# EAGLE board OpenBook-board (EAGLE 9.7.0)
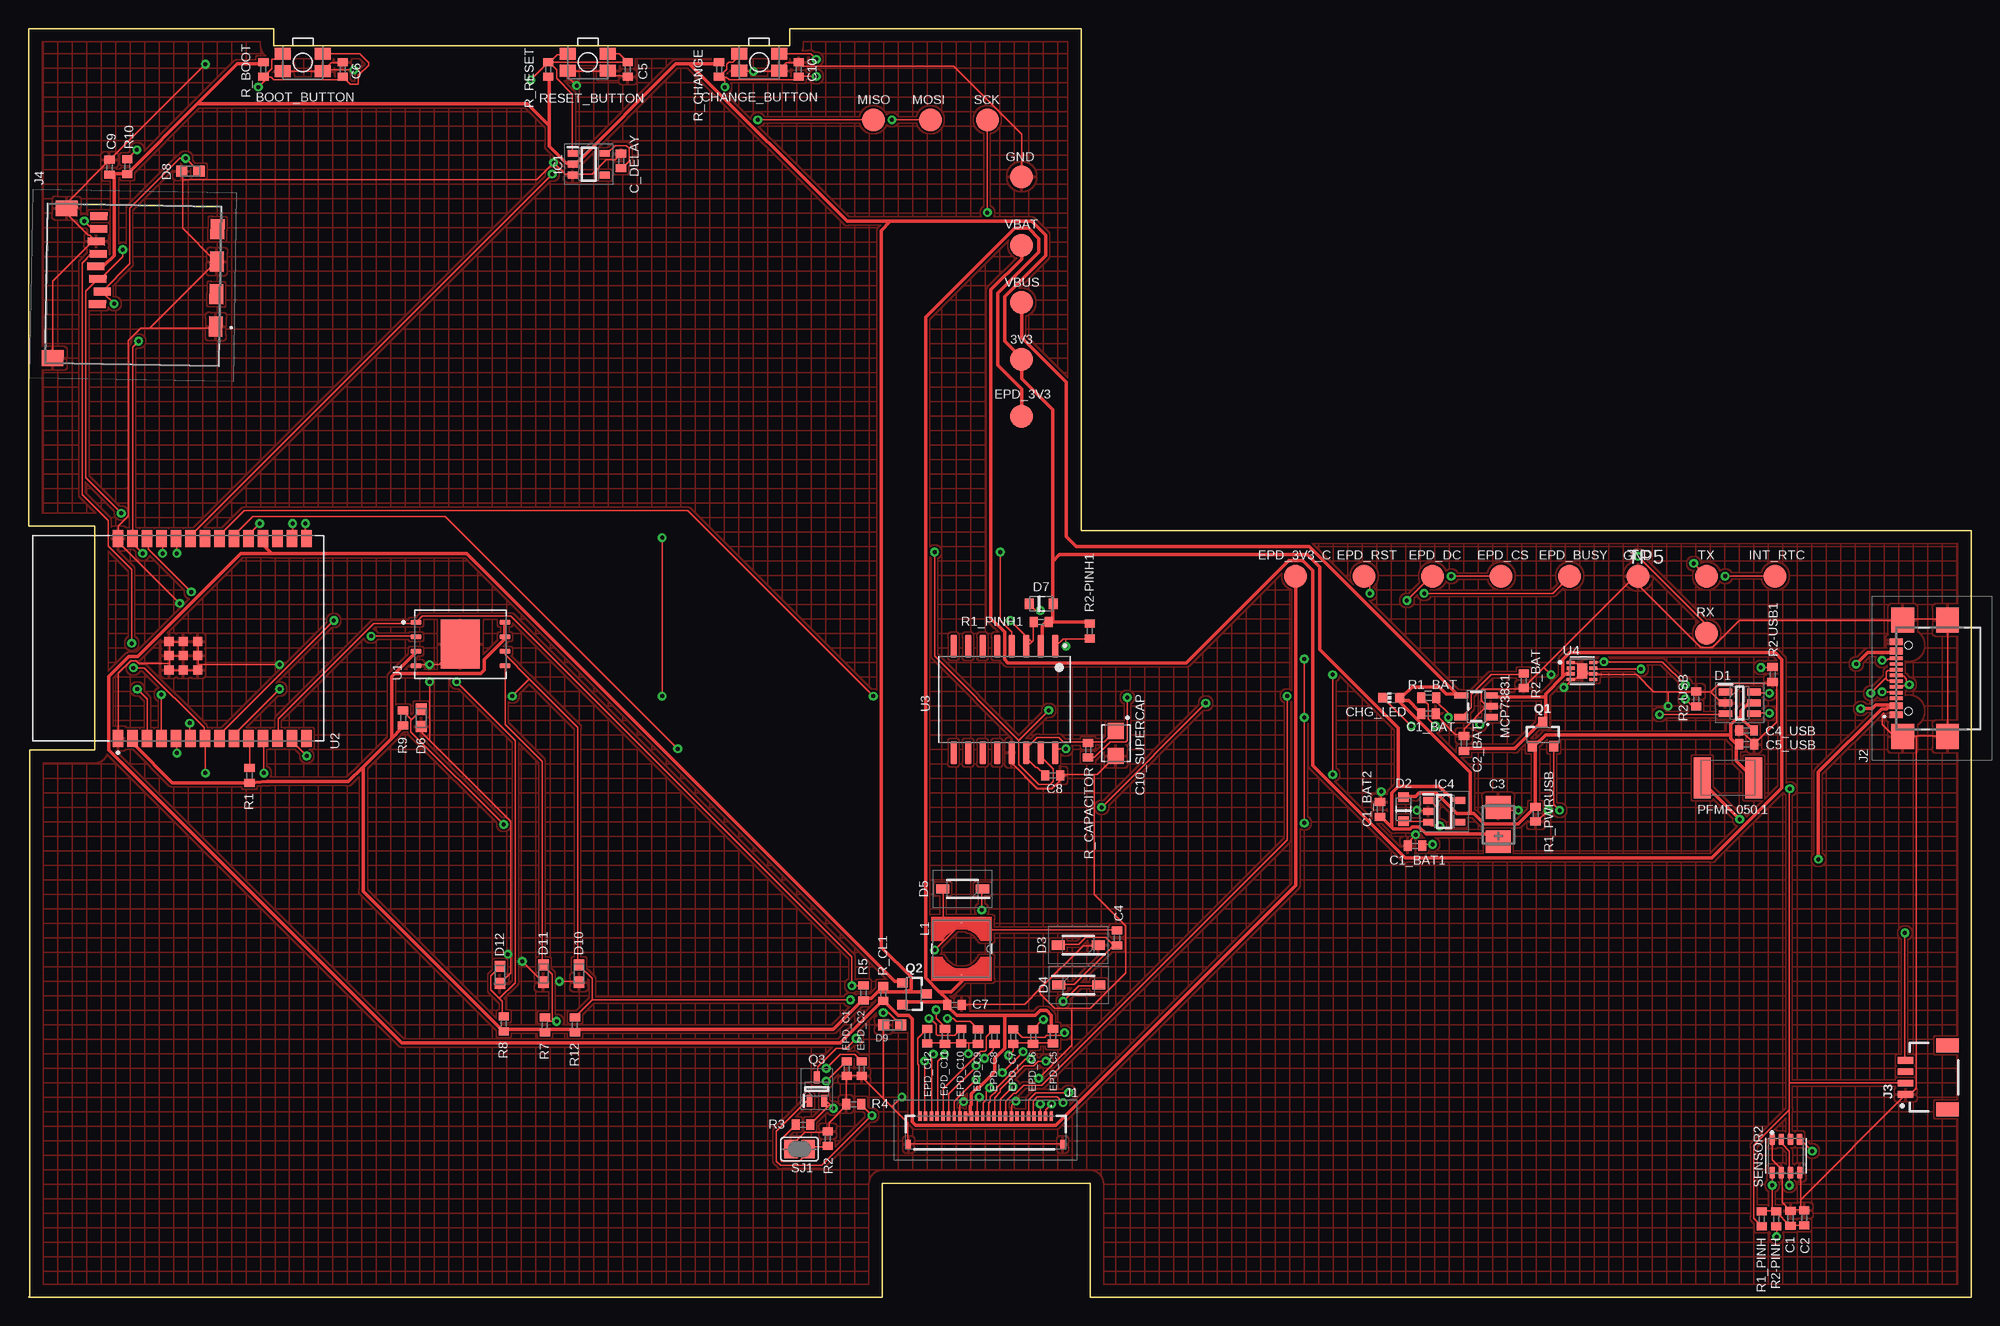
[diagram p0: board, top side]
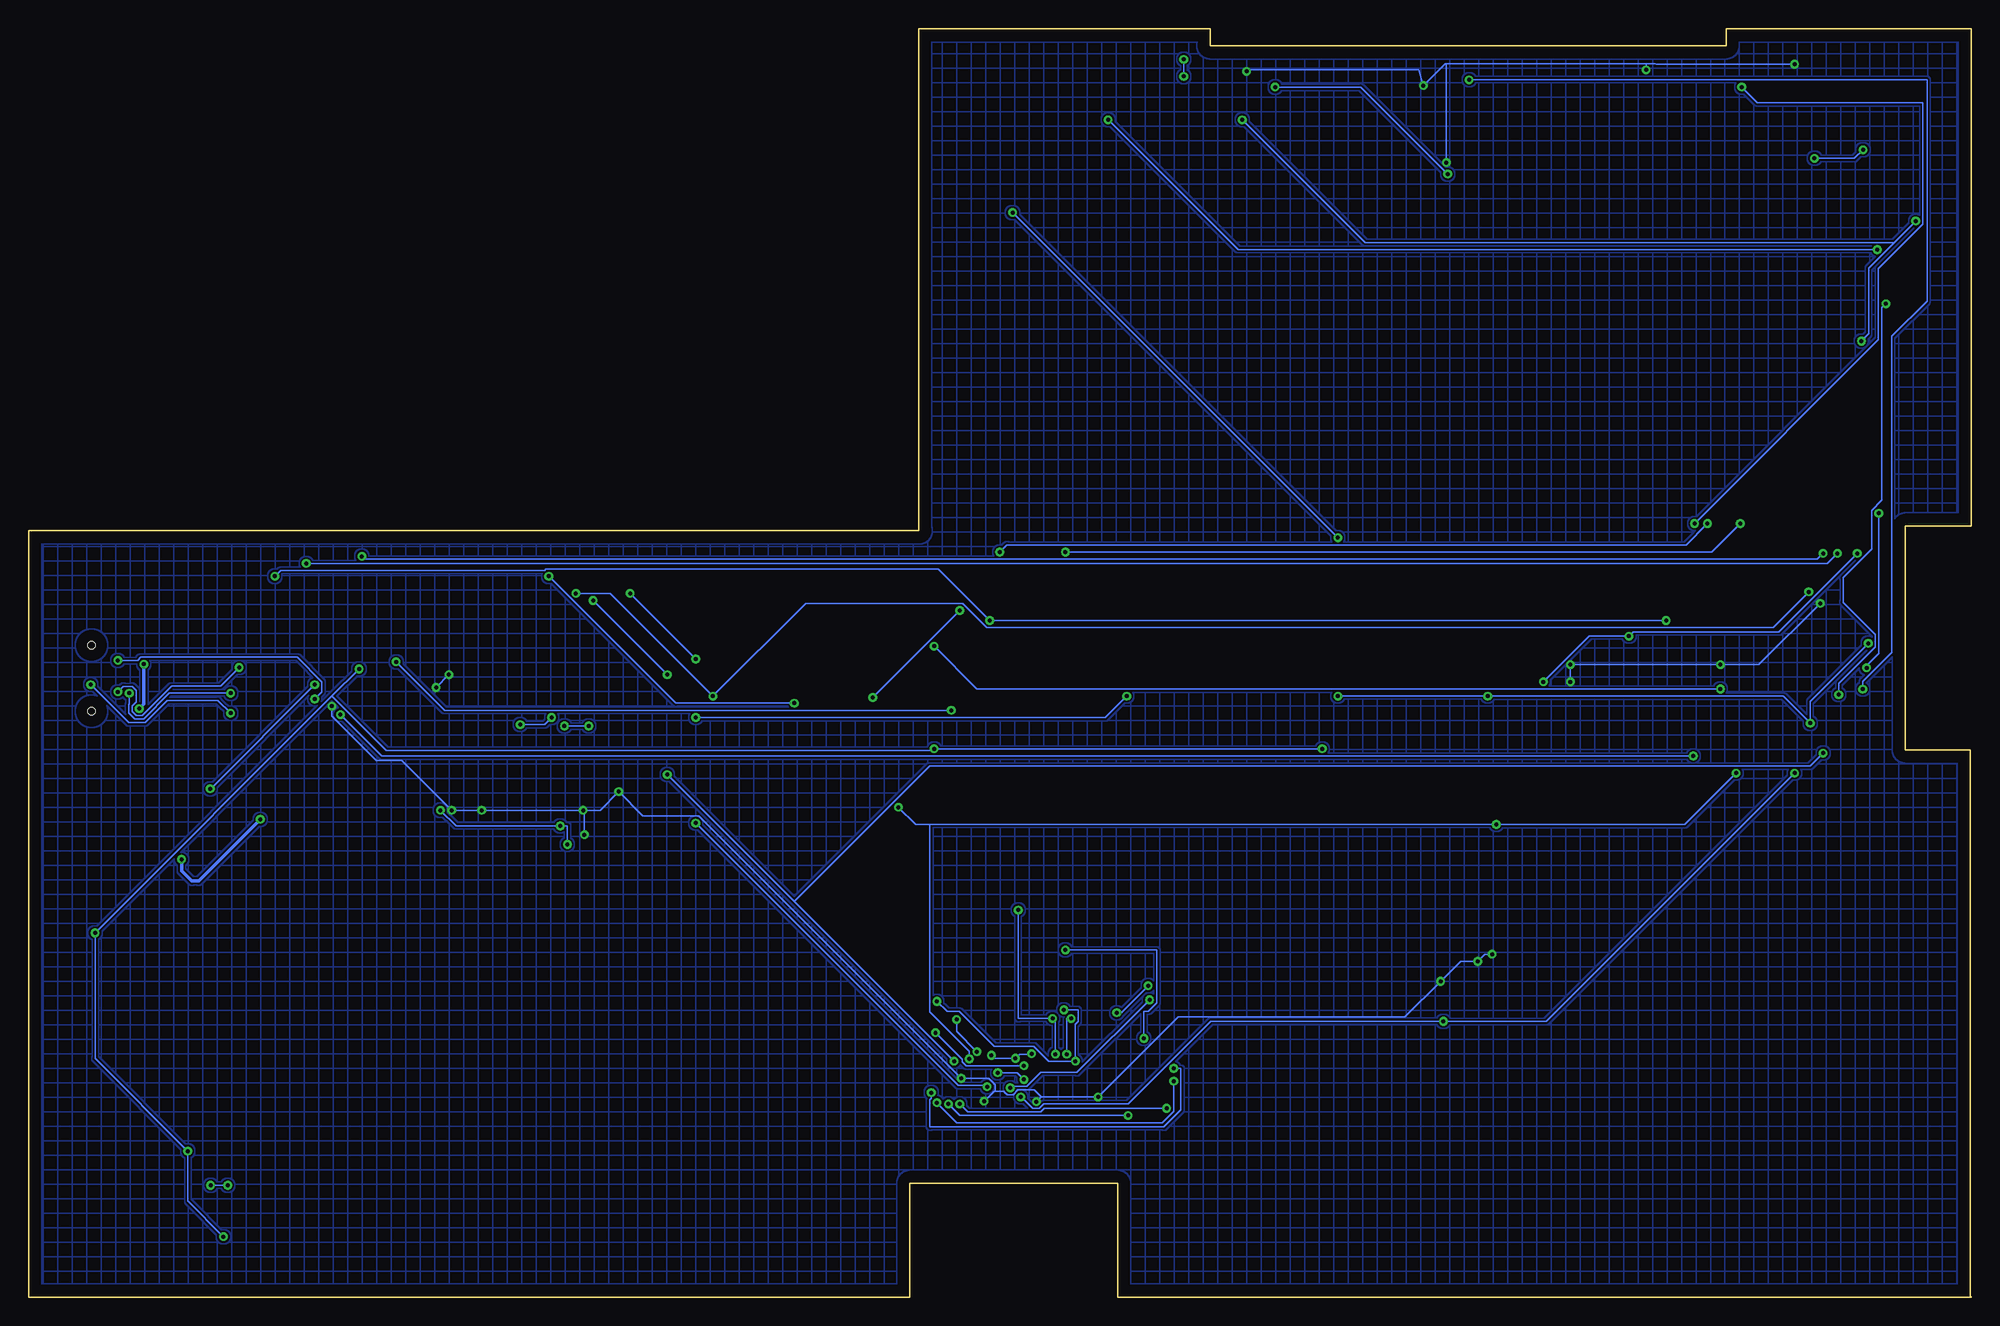
[diagram p1: board, bottom side, seen from below]

Size 170.2 x 111.2 mm. Coordinates in mm from the lower left corner, seen from the top.
Outline: 0,111.2 0,67.6 5.8,67.6 5.8,48 0.1,48 0.1,0.1 0,0 74.8,0 74.8,10 93,10 93,0 170.2,0 170.2,67.2 92.2,67.2 92.2,111.2 66.7,111.2 66.7,109.7 21.5,109.7 21.5,111.2 0,111.2
Copper layers (1*16): Top 0.035mm / dielectric 1.5mm / Bottom 0.035mm
Design rules "Fusion Electronics Design Rules": minimum track width 6mil, minimum drill 0.35mm, track to track 6mil, track to pad 6mil, pad to pad 6mil, via to via 6mil, smd to smd 6mil, copper to edge 40mil, drill to drill 6mil, minimum pad ring 10mil, minimum via ring 8mil, stop-mask expansion 4mil, vias tented up to drill 0mil, thermal gap 10mil
Net classes: 0 default: width 0.152 mm; 1 PowerNets: width 0.3 mm
bRestrict: area 0.3,48.8 to 6.4,66.9
vRestrict: area 0.3,48.7 to 6.4,66.8

## Footprints (pad centres in the part's own frame; a part is rotated, then mirrored left to right if it is on the bottom)
TP20R = smd 2 x 2: TP 0,0
MYBUTTON = smd 1.4 x 1.05: 1 1.75,0.75; 2 -1.75,0.75; 3 -1.75,-0.75; 4 1.75,-0.75
EAGLE-LTSPICE_C0402 = smd 0.7 x 0.9: 1 -0.65,0; 2 0.65,0
ESP32_WROVER_EAGLE-LTSPICE_C0402 = smd 0.7 x 0.9: 1 -0.65,0; 2 0.65,0
RCL_CT3528 = smd 2 x 2.2: + -1.5,0; - 1.5,0
CAPCP3225X100N = smd 1.4 x 1.4: 1 -1.1,0; 2 1.1,0
ADAFRUIT_CHIP-LED0603 = smd 0.8 x 0.8: A 0,-0.75; C 0,0.75
SOT95P280X145-6N = smd 1.2 x 0.6: 1 -1.25,0.95; 2 -1.25,0; 3 -1.25,-0.95; 4 1.25,-0.95; 5 1.25,0; 6 1.25,0.95
ESP32_WROVER_AVX---SD0805S020S1R0_AVX_SD0805S020S1R0_0 = smd 0.8 x 0.9: 1 -1.05,0; 2 1.05,0
SOD3716X135N = smd 1.15 x 0.8: 1 -1.75,0; 2 1.75,0
DIOC1608X36N = smd 0.97 x 0.94: 1 -0.75,0; 2 0.75,0
SOT95P280X125-5N = smd 0.9 x 0.6: 1 -1.4,0.95; 2 -1.4,0; 3 -1.4,-0.95; 4 1.4,-0.95; 5 1.4,0.95
SOT95P280X120-5N = smd 0.9 x 0.6: 1 -1.4,0.95; 2 -1.4,0; 3 -1.4,-0.95; 4 1.4,-0.95; 5 1.4,0.95
FH34SRJ24S05SH99 = smd 0.3 x 0.8: 1 5.75,1.45; 2 5.25,1.45; 3 4.75,1.45; 4 4.25,1.45; 5 3.75,1.45; 6 3.25,1.45; 7 2.75,1.45; 8 2.25,1.45; 9 1.75,1.45; 10 1.25,1.45; 11 0.75,1.45; 12 0.25,1.45; 13 -0.25,1.45; 14 -0.75,1.45; 15 -1.25,1.45; 16 -1.75,1.45; 17 -2.25,1.45; 18 -2.75,1.45; 19 -3.25,1.45; 20 -3.75,1.45; 21 -4.25,1.45; 22 -4.75,1.45; 23 -5.25,1.45; 24 -5.75,1.45 | smd 0.4 x 0.8: MP1 6.75,-1.05; MP2 -6.75,-1.05
SAMACSYS_PARTS_USB4110GFA = smd 0.3 x 1.15: A1 -3.35,3.678; A4 -2.55,3.678; A5 -1.25,3.678; A6 -0.25,3.678; A7 0.25,3.678; A8 1.25,3.678; A9 2.55,3.678; A12 3.35,3.678; B1 3.05,3.678; B4 2.25,3.678; B5 1.75,3.678; B6 0.75,3.678; B7 -0.75,3.678; B8 -1.75,3.678; B9 -2.25,3.678; B12 -3.05,3.678 | smd 2.18 x 2: MP1 -5.11,-0.827; MP2 5.11,-0.827; MP3 -5.11,3.103; MP4 5.11,3.103 | hole 0.65: -2.89,2.603; 2.89,2.603
JST04_1MM_RA = smd 0.6 x 1.35: 1 -1.5,0; 2 -0.5,0; 3 0.5,0; 4 1.5,0 | smd 1.2 x 2: NC1 2.8,-3.675; NC2 -2.8,-3.675
112ATAARR03ATTEND = smd 1.8 x 1.2: G1 10.6,10.4; G2 4.9,10.4; S1 7.75,10.4; S2 2.05,10.4 | smd 1.4 x 1.9: G3 13.6,-3.85; G4 0.45,-2.85 | smd 0.7 x 1.5: P1 8.8,0; P2 7.7,0.4; P3 6.6,0; P4 5.5,-0.2; P5 4.4,0; P6 3.3,-0.2; P7 2.2,0; P8 1.1,0
IND_4828-WE-TPC_WRE = smd 0.127 x 0.127: 1 -2.286,0; 2 2.286,0
ESP32_WROVER_SPARKFUN-IC-POWER_SOT23-5 = smd 0.55 x 1.2: 1 -0.95,-1.3; 2 0,-1.3; 3 0.95,-1.3; 4 0.95,1.3; 5 -0.95,1.3
ESP32C6_VARISTOR_CT/CN1812 = smd 1.5 x 3.6: 1 -2.25,0; 2 2.25,0
ESP32_WROVER_SPARKFUN-DISCRETESEMI_SOT23-3 = smd 0.8 x 0.9: 1 -0.95,-1; 2 0.95,-1; 3 0,1.1
SOT65P210X110-3N = smd 1.05 x 0.5: 1 -1.05,0.65; 2 -1.05,-0.65; 3 1.05,0
ESP32_WROVER_EAGLE-LTSPICE_R0402 = smd 0.7 x 0.9: 1 -0.65,0; 2 0.65,0
ESP32_WROVER_BME680_PSON80P300X300X100-8N = smd 1.016 x 0.5: 1 1.458,1.2; 2 1.458,0.4; 3 1.458,-0.4; 4 1.458,-1.2; 5 -1.458,-1.22; 6 -1.458,-0.4; 7 -1.458,0.4; 8 -1.458,1.2
SJ = smd 1.168 x 1.6: 1 -0.762,0; 2 0.762,0
SON127P600X800X80-9N = smd 0.94 x 0.44: 1 -3.895,1.905; 2 -3.895,0.635; 3 -3.895,-0.635; 4 -3.895,-1.905; 5 3.895,-1.905; 6 3.895,-0.635; 7 3.895,0.635; 8 3.895,1.905 | smd 3.4 x 4.3: 9 0,0
XCVR_ESP32-C6-WROOM-1-N8 = smd 1.5 x 0.9: 1 -8.75,5.26; 2 -8.75,3.99; 3 -8.75,2.72; 4 -8.75,1.45; 5 -8.75,0.18; 6 -8.75,-1.09; 7 -8.75,-2.36; 8 -8.75,-3.63; 9 -8.75,-4.9; 10 -8.75,-6.17; 11 -8.75,-7.44; 12 -8.75,-8.71; 13 -8.75,-9.98; 14 -8.75,-11.25; 15 8.75,-11.25; 16 8.75,-9.98; 17 8.75,-8.71; 18 8.75,-7.44; 19 8.75,-6.17; 20 8.75,-4.9; 21 8.75,-3.63; 22 8.75,-2.36; 23 8.75,-1.09; 24 8.75,0.18; 25 8.75,1.45; 26 8.75,2.72; 27 8.75,3.99; 28 8.75,5.26 | smd 0.8 x 0.8: 29_1 -2.755,0.79; 29_2 -1.505,0.79; 29_3 -0.255,0.79; 29_4 -2.755,-0.46; 29_5 -1.505,-0.46; 29_6 -0.255,-0.46; 29_7 -2.755,-1.71; 29_8 -1.505,-1.71; 29_9 -0.255,-1.71
SOIC127P1032X265-16N = smd 2.05 x 0.59: 1 -4.655,4.445; 2 -4.655,3.175; 3 -4.655,1.905; 4 -4.655,0.635; 5 -4.655,-0.635; 6 -4.655,-1.905; 7 -4.655,-3.175; 8 -4.655,-4.445; 9 4.655,-4.445; 10 4.655,-3.175; 11 4.655,-1.905; 12 4.655,-0.635; 13 4.655,0.635; 14 4.655,1.905; 15 4.655,3.175; 16 4.655,4.445
SON50P200X200X80-9N = smd 0.76 x 0.27: 1 -0.985,0.75; 2 -0.985,0.25; 3 -0.985,-0.25; 4 -0.985,-0.75; 5 0.985,-0.75; 6 0.985,-0.25; 7 0.985,0.25; 8 0.985,0.75 | smd 0.9 x 1.3: 9 0,0

## Placement (x,y rotation side)
3V3  TPTP20R  [TP20R]  87,82.2 0 top
BOOT_BUTTON  BUTTON_CUSYOMV1  [MYBUTTON]  24.03,108.23 180 top
C1  100nF  [EAGLE-LTSPICE_C0402]  154.35,6.94 90 top
C1_BAT  4.7uF  [EAGLE-LTSPICE_C0402]  122.64,51.16 0 top
C1_BAT1  4.7uF  [EAGLE-LTSPICE_C0402]  121.45,39.58 0 top
C1_BAT2  4.7uF  [ESP32_WROVER_EAGLE-LTSPICE_C0402]  118.39,42.78 90 top
C2  [EAGLE-LTSPICE_C0402]  155.55,6.98 90 top
C2_BAT  4.7uF  [EAGLE-LTSPICE_C0402]  125.75,48.56 90 top
C3  100uF TANT  [RCL_CT3528]  128.75,41.44 90 top
C4  4.7uF/25V  [EAGLE-LTSPICE_C0402]  95.35,31.5 90 top
C4_USB  100nF  [EAGLE-LTSPICE_C0402]  150.5,49.68 180 top
C5  1uF  [EAGLE-LTSPICE_C0402]  52.49,107.61 270 top
C5_USB  4.7uF  [EAGLE-LTSPICE_C0402]  150.51,48.48 0 top
C6  100nF  [EAGLE-LTSPICE_C0402]  27.53,107.61 90 top
C7  10uF  [ESP32_WROVER_EAGLE-LTSPICE_C0402]  81.12,25.64 0 top
C8  100nF  [EAGLE-LTSPICE_C0402]  89.71,45.74 0 top
C9  100nF  [ESP32_WROVER_EAGLE-LTSPICE_C0402]  7.09,99.04 90 top
C10  100nF  [EAGLE-LTSPICE_C0402]  67.47,107.61 90 top
C10_SUPERCAP  CPH3225A  [CAPCP3225X100N]  95.26,48.55 270 top
C_DELAY  100nF  [EAGLE-LTSPICE_C0402]  51.91,99.6 90 top
CHANGE_BUTTON  BUTTON_CUSYOMV1  [MYBUTTON]  64,108.23 180 top
CHG_LED  [ADAFRUIT_CHIP-LED0603]  119.38,52.55 90 top
D1  USBLC6-2SC6Y  [SOT95P280X145-6N]  149.9,52.1 0 top
D2  ESP32_WROVER_AVX---SD0805S020S1R0_AVX_SD0805S020S1R0_0_0AVX_SD0805S020S1R0_0_0  [ESP32_WROVER_AVX---SD0805S020S1R0_AVX_SD0805S020S1R0_0]  120.45,42.79 90 top
D3  MBR0530  [SOD3716X135N]  91.96,30.88 180 top
D4  MBR0530  [SOD3716X135N]  92,27.38 0 top
D5  MBR0530  [SOD3716X135N]  81.82,35.79 180 top
D6  PGB1010603MR  [DIOC1608X36N]  34.4,50.8 90 top
D7  ESP32_WROVER_AVX---SD0805S020S1R0_AVX_SD0805S020S1R0_0_0AVX_SD0805S020S1R0_0_0  [ESP32_WROVER_AVX---SD0805S020S1R0_AVX_SD0805S020S1R0_0]  88.7,60.79 0 top
D8  PGB1010603MR  [DIOC1608X36N]  14.18,98.7 0 top
D9  PGB1010603MR  [DIOC1608X36N]  75.65,23.88 0 top
D10  PGB1010603MR  [DIOC1608X36N]  48.23,28.38 90 top
D11  PGB1010603MR  [DIOC1608X36N]  45.11,28.38 90 top
D12  PGB1010603MR  [DIOC1608X36N]  41.29,28.28 90 top
EPD_3V3  TPTP20R  [TP20R]  87,77.2 0 top
EPD_3V3_C  TPTP20R  [TP20R]  111,63.2 0 top
EPD_BUSY  TPTP20R  [TP20R]  135,63.2 0 top
EPD_C1  1uF/50V  [EAGLE-LTSPICE_C0402]  71.68,20.06 90 top
EPD_C2  1uF/50V  [EAGLE-LTSPICE_C0402]  72.99,20.06 90 top
EPD_C5  0.1uF/50V  [EAGLE-LTSPICE_C0402]  89.75,22.9 90 top
EPD_C6  1uF/50V  [EAGLE-LTSPICE_C0402]  88,22.86 90 top
EPD_C7  1uF/50V  [EAGLE-LTSPICE_C0402]  86.25,22.86 90 top
EPD_C8  1uF/50V  [EAGLE-LTSPICE_C0402]  84.62,22.86 90 top
EPD_C9  1uF/50V  [EAGLE-LTSPICE_C0402]  83.17,22.86 90 top
EPD_C10  1uF/50V  [EAGLE-LTSPICE_C0402]  81.7,22.9 90 top
EPD_C11  1uF/50V  [EAGLE-LTSPICE_C0402]  80.28,22.88 90 top
EPD_C12  1uF/50V  [EAGLE-LTSPICE_C0402]  78.73,22.9 90 top
EPD_CS  TPTP20R  [TP20R]  129,63.2 0 top
EPD_DC  TPTP20R  [TP20R]  123,63.2 0 top
EPD_RST  TPTP20R  [TP20R]  117,63.2 0 top
GND  TPTP20R  [TP20R]  87,98.2 0 top
IC1  BD5229G-TR  [SOT95P280X125-5N]  49.07,99.3 0 top
IC4  XC6220A331MR-G  [SOT95P280X120-5N]  124.01,42.6 0 top
INT_RTC  TPTP20R  [TP20R]  153,63.2 0 top
J1  FH34SRJ-24S-0.5SH_99_  [FH34SRJ24S05SH99]  83.84,14.45 0 top
J2  SAMACSYS_PARTS_USB4110-GF-A  [SAMACSYS_PARTS_USB4110GFA]  167.28,54.26 90 top
J3  QWIIC_RIGHT_ANGLE  [JST04_1MM_RA]  164.43,19.29 90 top
J4  112A-TAAR-R03_ATTEND3DMODEL  [112ATAARR03ATTEND]  6.19,95.85 269 top
L1  744043680IND_4828-WE-TPC_WRE  [IND_4828-WE-TPC_WRE]  81.73,30.55 270 top
MCP73831  ESP32_WROVER_SPARKFUN-IC-POWER_MCP73831  [ESP32_WROVER_SPARKFUN-IC-POWER_SOT23-5]  126.81,51.8 90 top
MISO  TPTP20R  [TP20R]  74,103.2 0 top
MOSI  TPTP20R  [TP20R]  79,103.2 0 top
PFMF.050.1  ESP32C6_VARISTORCN1812  [ESP32C6_VARISTOR_CT/CN1812]  148.88,45.54 0 top
Q1  20V/4.2A/52mΩ/1.4W  [ESP32_WROVER_SPARKFUN-DISCRETESEMI_SOT23-3]  132.66,49.31 0 top
Q2  20V/4.2A/52mΩ/1.4W  [ESP32_WROVER_SPARKFUN-DISCRETESEMI_SOT23-3]  77.56,26.61 270 top
Q3  SI1308EDL-T1-GE3  [SOT65P210X110-3N]  69.05,18.26 90 top
R1  10K  [ESP32_WROVER_EAGLE-LTSPICE_R0402]  19.36,45.74 270 top
R1_BAT  200  [ESP32_WROVER_EAGLE-LTSPICE_R0402]  122.66,52.56 0 top
R1_PINH  10K  [ESP32_WROVER_EAGLE-LTSPICE_R0402]  151.83,6.88 90 top
R1_PINH1  10K  [ESP32_WROVER_EAGLE-LTSPICE_R0402]  88.71,59.2 0 top
R1_PWRUSB  100K  [ESP32_WROVER_EAGLE-LTSPICE_R0402]  132.02,42.35 90 top
R2  2.2  [ESP32_WROVER_EAGLE-LTSPICE_R0402]  70.01,13.92 270 top
R2-PINH  10K  [ESP32_WROVER_EAGLE-LTSPICE_R0402]  153.09,6.88 90 top
R2-PINH1  10K  [ESP32_WROVER_EAGLE-LTSPICE_R0402]  92.97,58.4 90 top
R2-USB  5k1  [ESP32_WROVER_EAGLE-LTSPICE_R0402]  146.09,52.44 90 top
R2-USB1  5k1  [ESP32_WROVER_EAGLE-LTSPICE_R0402]  152.78,54.58 90 top
R2_BAT  2K  [ESP32_WROVER_EAGLE-LTSPICE_R0402]  130.98,54.04 90 top
R3  0.47  [ESP32_WROVER_EAGLE-LTSPICE_R0402]  67.84,15.14 0 top
R4  10K  [ESP32_WROVER_EAGLE-LTSPICE_R0402]  72.28,16.94 0 top
R5  [ESP32_WROVER_EAGLE-LTSPICE_R0402]  73.14,26.68 90 top
R7  [ESP32_WROVER_EAGLE-LTSPICE_R0402]  45.23,23.88 90 top
R8  [ESP32_WROVER_EAGLE-LTSPICE_R0402]  41.62,23.98 90 top
R9  [ESP32_WROVER_EAGLE-LTSPICE_R0402]  32.81,50.78 90 top
R10  [ESP32_WROVER_EAGLE-LTSPICE_R0402]  8.64,99.08 90 top
R12  [ESP32_WROVER_EAGLE-LTSPICE_R0402]  47.86,23.88 90 top
R_BOOT  10K  [ESP32_WROVER_EAGLE-LTSPICE_R0402]  20.58,107.61 90 top
R_CAPACITOR  15  [ESP32_WROVER_EAGLE-LTSPICE_R0402]  92.82,47.95 90 top
R_CHANGE  10K  [ESP32_WROVER_EAGLE-LTSPICE_R0402]  60.49,107.61 90 top
R_CL1  10K  [ESP32_WROVER_EAGLE-LTSPICE_R0402]  74.87,26.64 90 top
R_RESET  10K  [ESP32_WROVER_EAGLE-LTSPICE_R0402]  45.53,107.61 270 top
RESET_BUTTON  BUTTON_CUSYOMV1  [MYBUTTON]  48.99,108.23 180 top
RX  TPTP20R  [TP20R]  147,58.2 0 top
SCK  TPTP20R  [TP20R]  84,103.2 0 top
SENSOR2  ESP32_WROVER_BME680_BME680  [ESP32_WROVER_BME680_PSON80P300X300X100-8N]  153.94,12.4 90 top
SJ1  [SJ]  67.54,13 0 top
TP5  TPTP20R  [TP20R]  141,63.2 0 top
TX  TPTP20R  [TP20R]  147,63.2 0 top
U1  W25Q512JVEIQ  [SON127P600X800X80-9N]  37.83,57.26 0 top
U2  ESP32-C6-WROOM-1-N8  [XCVR_ESP32-C6-WROOM-1-N8]  13.1,57.75 90 top
U3  DS3231SN#  [SOIC127P1032X265-16N]  85.49,52.4 270 top
U4  MAX17048G+T10  [SON50P200X200X80-9N]  136.1,54.9 0 top
VBAT  TPTP20R  [TP20R]  87,92.2 0 top
VBUS  TPTP20R  [TP20R]  87,87.2 0 top

## Library data of the parts
3V3 BOOT_BUTTON CHANGE_BUTTON CHG_LED EPD_3V3 EPD_3V3_C EPD_BUSY EPD_CS EPD_DC EPD_RST GND INT_RTC J4 MISO MOSI PFMF.050.1 RESET_BUTTON RX SCK SJ1 TP5 TX VBAT VBUS = DeskAssistant v19 v1
C1 C1_BAT C1_BAT1 C1_BAT2 C2 C2_BAT C4 C4_USB C5 C5_USB C6-C10 C_DELAY EPD_C1 EPD_C2 EPD_C5-EPD_C12 = DeskAssistant v19 v1; SPICEMODEL: NONE; SPICEPREFIX: C
C3 = DeskAssistant v19 v1; SPICEPREFIX: C
C10_SUPERCAP = DeskAssistant v19 v1; AVAILABILITY: Not in stock; CHECK_PRICES: https://www.snapeda.com/parts/CPH3225A/Seiko+Instruments/view-part/?ref=eda; DESCRIPTION: 11 mF (EDLC) Supercapacitor 3.3 V 1210 (3225 Metric) - -; MF: Seiko Instruments; MP: CPH3225A; PACKAGE: 1210 Seiko; PRICE: None; PURCHASE-URL: https://www.snapeda.com/api/url_track_click_mouser/?unipart_id=562593&manufacturer=Seiko Instruments&part_name=CPH3225A&search_term=None; SNAPEDA_LINK: https://www.snapeda.com/parts/CPH3225A/Seiko+Instruments/view-part/?ref=snap
D1 = DeskAssistant v19 v1; AVAILABILITY: In Stock; CHECK_PRICES: https://www.snapeda.com/parts/USBLC6-2SC6Y/STMicroelectronics/view-part/?ref=eda; DESCRIPTION: 17V Clamp 5A (8/20µs) Ipp Tvs Diode Surface Mount SOT-23-6; MF: STMicroelectronics; MP: USBLC6-2SC6Y; PACKAGE: SOT-23-6 STMicroelectronics; PRICE: None; SNAPEDA_LINK: https://www.snapeda.com/parts/USBLC6-2SC6Y/STMicroelectronics/view-part/?ref=snap
D2 D7 = DeskAssistant v19 v1; CENTROID_NOT_SPECIFIED: No; DATASHEET: http://datasheets.avx.com/schottky.pdf; DIGIKEY_DESCRIPTION: DIODE SCHOTTKY 20V 1A 0805; DIGIKEY_PART_NUMBER: 478-7800-1-ND; LEAD_FREE: yes; MF: AVX; MOUSER_PART_NUMBER: 581-SD0805S020S1R0; PACKAGE: 0805 (2012 metric); PREFIX: D; ROHS: yes; TEMPERATURE_RANGE_HIGH: +125°C; TEMPERATURE_RANGE_LOW: -55°C
D3-D5 = DeskAssistant v19 v1; AVAILABILITY: In Stock; CHECK_PRICES: https://www.snapeda.com/parts/MBR0530/Onsemi/view-part/?ref=eda; DESCRIPTION: Diode Schottky 30 V 500mA Surface Mount SOD-123; MF: ON Semiconductor; MP: MBR0530; PACKAGE: SOD-123-2 ON Semiconductor; PRICE: None; PURCHASE-URL: https://www.snapeda.com/api/url_track_click_mouser/?unipart_id=179458&manufacturer=ON Semiconductor&part_name=MBR0530&search_term=None; SNAPEDA_LINK: https://www.snapeda.com/parts/MBR0530/Onsemi/view-part/?ref=snap
D6 D8-D12 = DeskAssistant v19 v1; AVAILABILITY: In Stock; CHECK_PRICES: https://www.snapeda.com/parts/PGB1010603MR/Littelfuse/view-part/?ref=eda; DESCRIPTION: 150V (Typ) Clamp - Ipp Tvs Diode Surface Mount 0603 (1608 Metric); MF: Littelfuse Inc.; MP: PGB1010603MR; PACKAGE: 0603 Littelfuse Inc.; PRICE: None; PURCHASE-URL: https://www.snapeda.com/api/url_track_click_mouser/?unipart_id=5659453&manufacturer=Littelfuse Inc.&part_name=PGB1010603MR&search_term=None; SNAPEDA_LINK: https://www.snapeda.com/parts/PGB1010603MR/Littelfuse/view-part/?ref=snap
IC1 = DeskAssistant v19 v1; DESCRIPTION: Voltage Detector with Adjustable Delay Time: CMOS processes are utilized to develop high precision, low current consumption CMOS reset ICs that allow arbitrary setting of the delay time. The extensive lineup includes both Nch Open Drain and CMOS output types in a wide range of detection voltages (from 2.3V to 6.0V, in 0.1V steps), enabling selection of the ideal solution based on customer requirements. In addition, the entire series is of course both lead-free and RoHS-compliant.; HEIGHT: 1.25mm; MANUFACTURER_NAME: ROHM Semiconductor; MANUFACTURER_PART_NUMBER: BD5229G-TR; MOUSER_PART_NUMBER: 755-BD5229G-TR; MOUSER_PRICE-STOCK: https://www.mouser.co.uk/ProductDetail/ROHM-Semiconductor/BD5229G-TR?qs=4kLU8WoGk0vvnhrrYwdszw%3D%3D
IC4 = DeskAssistant v19 v1; DESCRIPTION: LDO Voltage Regulators; HEIGHT: 1.2mm; MANUFACTURER_NAME: Torex; MANUFACTURER_PART_NUMBER: XC6220A331MR-G; MOUSER_PART_NUMBER: 865-XC6220A331MR-G; MOUSER_PRICE-STOCK: https://www.mouser.co.uk/ProductDetail/Torex-Semiconductor/XC6220A331MR-G?qs=AsjdqWjXhJ8ZSWznL1J0gg%3D%3D
J1 = DeskAssistant v19 v1; DESCRIPTION: 24 Position FFC, FPC Connector Contacts, Top and Bottom 0.020" (0.50mm) Surface Mount, Right Angle; HEIGHT: 1.1mm; MANUFACTURER_NAME: Hirose; MANUFACTURER_PART_NUMBER: FH34SRJ-24S-0.5SH(99); MOUSER_PART_NUMBER: 798-FH34SRJ24S05SH99; MOUSER_PRICE-STOCK: https://www.mouser.co.uk/ProductDetail/Hirose-Connector/FH34SRJ-24S-0.5SH99?qs=vcbW%252B4%252BSTIpKBl5ap9J8Fw%3D%3D
J2 = DeskAssistant v19 v1; DESCRIPTION: CONN USB 2.0 TYPE-C R/A SMT; HEIGHT: 3.26mm; MANUFACTURER_NAME: GCT (GLOBAL CONNECTOR TECHNOLOGY); MANUFACTURER_PART_NUMBER: USB4110-GF-A; MOUSER_PART_NUMBER: 640-USB4110-GF-A; MOUSER_PRICE-STOCK: https://www.mouser.co.uk/ProductDetail/GCT/USB4110-GF-A?qs=KUoIvG%2F9IlYiZvIXQjyJeA%3D%3D
J3 = DeskAssistant v19 v1; PROD_ID: CONN-13694
L1 = DeskAssistant v19 v1; COPYRIGHT: Copyright (C) 2024 Ultra Librarian. All rights reserved.; MANUFACTURER_PART_NUMBER: 744043680; MFR_NAME: Wurth Electronics
MCP73831 = DeskAssistant v19 v1; PROD_ID: IC-09995
Q1 Q2 = DeskAssistant v19 v1; PROD_ID: TRAN-14388
Q3 = DeskAssistant v19 v1; AVAILABILITY: In Stock; CHECK_PRICES: https://www.snapeda.com/parts/SI1308EDL-T1-GE3/Vishay+Siliconix/view-part/?ref=eda; DESCRIPTION: Si1308EDL-T1-GE3 N-channel MOSFET Transistor, 1.5 A, 30 V, 3-Pin SC-70 | Siliconix / Vishay SI1308EDL-T1-GE3; MF: Vishay Siliconix; MP: SI1308EDL-T1-GE3; PACKAGE: SOT-323 Vishay Semiconductor; PRICE: None; PURCHASE-URL: https://www.snapeda.com/api/url_track_click_mouser/?unipart_id=274603&manufacturer=Vishay Siliconix&part_name=SI1308EDL-T1-GE3&search_term=None; SNAPEDA_LINK: https://www.snapeda.com/parts/SI1308EDL-T1-GE3/Vishay+Siliconix/view-part/?ref=snap
R1 R1_BAT R1_PINH R1_PINH1 R1_PWRUSB R2 R2-PINH R2-PINH1 R2-USB R2-USB1 R2_BAT R3-R5 R7-R10 R12 R_BOOT R_CAPACITOR R_CHANGE R_CL1 R_RESET = DeskAssistant v19 v1; SPICEMODEL: NONE; SPICEPREFIX: R
SENSOR2 = DeskAssistant v19 v1; AVAILABILITY: Unavailable; DESCRIPTION: Integrated Environmental Unit; MF: Bosch Sensortec; MP: BME680; PACKAGE: LGA-8 Bosch Tools; PRICE: None
U1 = DeskAssistant v19 v1; AVAILABILITY: In Stock; CHECK_PRICES: https://www.snapeda.com/parts/W25Q512JVEIQ/Winbond+Electronics/view-part/?ref=eda; DESCRIPTION: FLASH - NOR Memory IC 512Mb (64M x 8) SPI - Quad I/O 133 MHz 8-WSON (8x6); MF: Winbond Electronics; MP: W25Q512JVEIQ; PACKAGE: Package; PRICE: None; SNAPEDA_LINK: https://www.snapeda.com/parts/W25Q512JVEIQ/Winbond+Electronics/view-part/?ref=snap
U2 = DeskAssistant v19 v1; AVAILABILITY: In Stock; CHECK_PRICES: https://www.snapeda.com/parts/ESP32-C6-WROOM-1-N8/Espressif+Systems/view-part/?ref=eda; DESCRIPTION: Multiprotocol Modules ESP32-C6 module, Wi-Fi 6 in 2.4 GHz band, Bluetooth 5, Zigbee 3.0 and Thread. ESP34-WROOM Compatible - ENGINEERING SAMPLE; MF: Espressif Systems; MP: ESP32-C6-WROOM-1-N8; PACKAGE: None; PRICE: None; SNAPEDA_LINK: https://www.snapeda.com/parts/ESP32-C6-WROOM-1-N8/Espressif+Systems/view-part/?ref=snap
U3 = DeskAssistant v19 v1; AVAILABILITY: In Stock; CHECK_PRICES: https://www.snapeda.com/parts/DS3231SN%23/Analog+Devices/view-part/?ref=eda; DESCRIPTION: Extremely Accurate I²C-Integrated RTC/TCXO/Crystal; MF: Analog Devices; MP: DS3231SN#; PACKAGE: SOIC-16 Maxim; PRICE: None; PURCHASE-URL: https://www.snapeda.com/api/url_track_click_mouser/?unipart_id=99048&manufacturer=Analog Devices&part_name=DS3231SN#&search_term=None; SNAPEDA_LINK: https://www.snapeda.com/parts/DS3231SN%23/Analog+Devices/view-part/?ref=snap
U4 = DeskAssistant v19 v1; AVAILABILITY: In Stock; CHECK_PRICES: https://www.snapeda.com/parts/MAX17048G+T10/Analog+Devices/view-part/?ref=eda; DESCRIPTION: 3µA 1-Cell/2-Cell Fuel Gauge with ModelGauge; MF: Analog Devices; MP: MAX17048G+T10; PACKAGE: TDFN-8 Maxim; PRICE: None; PURCHASE-URL: https://www.snapeda.com/api/url_track_click_mouser/?unipart_id=329239&manufacturer=Analog Devices&part_name=MAX17048G+T10&search_term=None; SNAPEDA_LINK: https://www.snapeda.com/parts/MAX17048G+T10/Analog+Devices/view-part/?ref=snap

## Nets
3V3 [PowerNets]: 3V3.TP C1_BAT2.1 C3.+ C9.1 D7.2 IC1.2 IC4.5 J4.P4 Q2.3 R1.2 R1_PINH1.2 R2-PINH1.2 R5.1 R7.1 R8.1 R9.1 R10.1 R12.1 R_BOOT.2 R_CHANGE.2 R_CL1.2 R_RESET.2 U1.3 U1.7 U1.8 U2.2 U3.2
32KHZ: R2-PINH1.1 U2.9 U3.1
DN: D1.4 J2.A7 J2.B7
DP: D1.6 J2.A6 J2.B6
EPD_3V3 [PowerNets]: C7.1 EPD_3V3.TP EPD_C5.2 J1.15 J1.16 L1.2 Q2.2
EPD_3V3_C [PowerNets]: EPD_3V3_C.TP Q2.1 R_CL1.1 U2.18
EPD_BUSY: EPD_BUSY.TP J1.9 U2.26
EPD_CS: D6.2 EPD_CS.TP J1.12 R9.2 U2.11
EPD_DC: EPD_DC.TP J1.11 U2.5
EPD_RST: EPD_RST.TP J1.10 U2.21
FLASH_CS: D9.2 R5.2 U1.1 U2.12
GDR: J1.2 Q3.1 R4.2
GND: BOOT_BUTTON.1 BOOT_BUTTON.2 C1.2 C1_BAT1.1 C1_BAT2.2 C1_BAT.2 C2.2 C2_BAT.2 C3.- C4_USB.2 C5.2 C5_USB.2 C6.2 C7.2 C8.2 C9.2 C10.2 C10_SUPERCAP.2 C_DELAY.2 CHANGE_BUTTON.1 CHANGE_BUTTON.2 D1.2 D3.1 D6.1 D8.1 D9.1 D10.1 D11.1 D12.1 EPD_C1.1 EPD_C2.1 GND.TP IC1.3 IC4.2 J1.8 J1.17 J1.MP1 J1.MP2 J2.A1 J2.A12 J2.B1 J2.B12 J2.MP1 J2.MP2 J2.MP3 J2.MP4 J3.1 J4.G1 J4.G2 J4.G3 J4.G4 J4.P6 MCP73831.2 R1_PWRUSB.1 R2-USB1.1 R2-USB.2 R2.1 R2_BAT.1 R4.1 RESET_BUTTON.1 RESET_BUTTON.2 SENSOR2.1 SENSOR2.5 SENSOR2.7 SJ1.1 TP5.TP U1.4 U1.9 U2.1 U2.28 U2.29_1 U2.29_2 U2.29_3 U2.29_4 U2.29_5 U2.29_6 U2.29_7 U2.29_8 U2.29_9 U3.13 U4.1 U4.4 U4.6 U4.9
GPIO8: R1.1 U2.10
I2C_PW: C1.1 C2.1 R1_PINH.2 R2-PINH.2 SENSOR2.2 SENSOR2.6 SENSOR2.8
I2C_RST: U2.17
INT_RTC: INT_RTC.TP R1_PINH1.1 U2.8 U3.3
IO/BOOT: BOOT_BUTTON.3 BOOT_BUTTON.4 C6.1 R_BOOT.1 U2.15
IO/CHANGE: C10.1 CHANGE_BUTTON.3 CHANGE_BUTTON.4 R_CHANGE.1 U2.23
MISO: D12.2 J4.P7 MISO.TP R8.2 U1.2 U2.27
MOSI: D11.2 J1.14 J4.P3 MOSI.TP R7.2 U1.5 U2.7
N$1: C_DELAY.1 IC1.5
N$2: C1_BAT1.2 D2.1 IC4.1 IC4.3 Q1.2
N$3: MCP73831.1 R1_BAT.2
N$4: J2.B5 R2-USB.1
N$5: J2.A5 R2-USB1.2
N$6: C4.1 D3.2 D4.1
N$7: CHG_LED.C R1_BAT.1
N$8: MCP73831.5 R2_BAT.2
N$9: EPD_C12.2 J1.24
N$11: EPD_C10.2 J1.22
N$12: J3.3
N$13: EPD_C8.2 J1.20
N$14: EPD_C7.2 J1.19
N$15: EPD_C6.2 J1.18
N$17: D7.1 R_CAPACITOR.1
N$26: EPD_C2.2 J1.5
N$27: EPD_C1.2 J1.4
N$32: EPD_C5.1 EPD_C6.1 EPD_C7.1 EPD_C8.1 EPD_C9.1 EPD_C10.1 EPD_C11.1 EPD_C12.1
PREVGH: D5.1 EPD_C9.2 J1.21
PREVGL: D4.2 EPD_C11.2 J1.23
RESE: J1.3 Q3.2 R3.2
RESE': R2.2 R3.1 SJ1.2
RESET: C5.1 IC1.1 R_RESET.1 RESET_BUTTON.3 RESET_BUTTON.4 U2.3
RTC_RST: U2.16 U3.4
RX: RX.TP U2.24
SCK: D10.2 J1.13 J4.P5 R12.2 SCK.TP U1.6 U2.6
SCL: J3.4 R2-PINH.1 SENSOR2.4 U2.20 U3.16 U4.7
SDA: J3.2 R1_PINH.1 SENSOR2.3 U2.19 U3.15 U4.8
SRC: C4.2 D5.2 L1.1 Q3.3
SS_SD: D8.2 J4.P2 R10.2 U2.4
TX: TX.TP U2.25
USB-D+: D1.1
USB_D+: U2.14
USB_D-: D1.3 U2.13
VBAT [PowerNets]: C2_BAT.1 MCP73831.3 Q1.3 U4.2 U4.3 VBAT.TP
VBUS [PowerNets]: C1_BAT.1 C4_USB.1 C5_USB.1 CHG_LED.A D1.5 D2.2 MCP73831.4 PFMF.050.1.2 Q1.1 R1_PWRUSB.2 VBUS.TP
VRTC: C8.1 C10_SUPERCAP.1 R_CAPACITOR.2 U3.14
VUSB [PowerNets]: J2.A4 J2.A9 J2.B4 J2.B9 PFMF.050.1.1

## Tracks (layer width: path | path; a pad name or v marks a point on that pad's centre or on a via)
3V3
  Top 0.3: 74.4,26.8 74.7,27.1 R_CL1.2 | 74.4,26.8 73.8,26.2 73.2,26.2 R5.1 72.9,25.9 70.5,23.5 48,23.5 R12.1 47.7,23.5 45.3,23.5 R7.1 45,23.5 41.7,23.5 R8.1 41.4,23.5 29.3,35.6 29.3,46.5 | 74.4,26.8 76.8,26.8 | 76.8,26.8 78.6,26.8 Q2.3 | U1.8 41.7,59.2 41.7,58 U1.7 41.7,57.7 39.9,55.9 39.9,55 39.6,54.7 32.1,54.7 | 31.8,49 32.7,49.9 R9.1 | 31.8,49 29.3,46.5 | 29.3,46.5 28,45.2 20.9,45.2 R1.2 19.2,45.1 12.6,45.1 9.3,48.4 9.3,49 U2.2 | 32.1,54.7 31.8,54.4 31.8,49 | 32.1,54.7 33.9,56.5 U1.3 | 45.6,102.7 45.6,106.9 R_RESET.2 | 45.6,102.7 45.6,100.9 47.1,99.4 47.4,99.4 IC1.2 47.7,99.1 56.7,108.1 57.9,108.1 | 57.9,108.1 60.3,108.1 R_CHANGE.2 | 7.5,98.5 8.4,98.5 R10.1 8.7,98.5 14.8,104.6 | 7.5,98.5 7.2,98.5 C9.1 7.5,98.5 | 14.8,104.6 18.3,108.1 20.4,108.1 R_BOOT.2 | 7.5,98.5 7.5,91.3 6.6,90.4 6,90.4 J4.P4 | 119.4,41.2 118.5,42.1 C1_BAT2.1 | C3.+ 128.7,40 128.1,40.6 122.42,40.6 121.8,41.22 121.23,41.22 121.05,41.04 119.56,41.04 119.4,41.2 | 120,44.8 123.6,44.8 124.8,43.6 125.4,43.6 IC4.5 | 120,44.8 119.4,44.2 119.4,41.2 | 89.7,59.2 92.7,59.2 R2-PINH1.2 | 89.7,59.2 R1_PINH1.2 | 89.7,59.2 89.7,60.7 D7.2 89.7,61 89.7,64.5 | 89.4,59.2 R1_PINH1.2 | 89.7,64.5 89.7,77.8 87,80.5 3V3.TP 87,82.3 85.5,83.8 85.5,87.7 89.1,91.3 89.1,93.1 87.9,94.3 75.5,94.3 | U3.2 88.8,57.1 88.8,58.9 89.1,59.2 R1_PINH1.2 | 120,44.8 120,49.9 113.1,56.8 113.1,64 112,65.1 90.3,65.1 89.7,64.5 | 57.9,108.1 71.7,94.3 75.5,94.3 | 76.8,26.8 76.86,26.86 77.14,26.86 77.31,27.04 77.31,28.09 74.7,30.7 74.7,93.5 75.5,94.3 | 14.8,104.6 43.7,104.6 45.6,102.7
32KHZ  (via drill 0.35)
  Top 0.152: 90.88,57.7 90.62,57.7 90,57.08 U3.1 | 90.88,57.7 92.88,57.7 R2-PINH1.1 | U2.9 18,49.33 v22,53.33 | 90.88,57.7 v90.88,57.08
  Bottom 0.152: v22,53.33 87.12,53.33 v90.88,57.08
DN  (via drill 0.35)
  Top 0.152: 164.5,53.95 164.5,54.2 164.25,54.45 164,54.45 163.66,54.45 | 164.5,53.95 164.5,53.83 164.25,53.58 163.62,53.58 J2.B7 | 163.62,54.45 163.66,54.45 | v152.5,51.2 151.25,51.2 D1.4 | 164.5,53.95 v164.75,53.7 | J2.A7 163.66,54.45
  Bottom 0.152: v152.5,51.2 153.62,52.33 158.06,52.33 160,50.38 161.43,50.38 v164.75,53.7
DP  (via drill 0.35)
  Top 0.152: 162.75,54.33 162.75,54.83 162.88,54.95 163.4,54.95 163.5,54.95 163.54,54.95 J2.B6 | 162.75,54.33 162.75,54.2 162.88,54.08 163.5,54.08 J2.A6 | v152.5,52.95 151.25,52.95 D1.6 | 162.75,54.33 v161.38,52.95
  Bottom 0.152: v152.5,52.95 157.86,52.95 160.12,50.69 160.88,50.69 161.41,51.22 161.41,51.98 161.38,52.01 v161.38,52.95
EPD_3V3
  Top 0.3: 82.5,16 82.2,16 J1.16 | Q2.2 76.8,25.9 80.4,25.9 C7.1 | 85.5,24.7 81.3,24.7 80.4,25.6 C7.1 | 82.5,16 J1.15 | EPD_3V3.TP 87,79.6 84.9,81.7 84.9,88 88.5,91.6 88.5,92.8 87.6,93.7 86.4,93.7 78.6,85.9 78.6,28 79.8,26.8 | 80.01,26.59 80.31,26.29 80.7,25.9 C7.1 | 80.01,26.59 79.8,26.8 | L1.2 81.73,27.7 81.51,27.49 80.83,26.8 79.8,26.8 | 80,26.57 80.01,26.59 | 82.5,16 82.5,16.78 82.6,16.88 82.6,17.86 83.16,18.42 83.28,18.42 84.62,19.76 84.62,20.94 85.5,21.82 85.5,24.7 | 85.5,24.7 88.19,24.7 88.62,25.14 89.19,25.14 89.59,24.74 89.59,23.71 EPD_C5.2
EPD_3V3_C
  Top 0.3: EPD_3V3_C.TP 111,36.1 90,15.1 77.7,15.1 77.4,15.4 77.4,24.4 77.1,24.7 76.2,24.7 75,25.9 R_CL1.1 74.7,25.9 71.1,22.3 32.7,22.3 7.04,47.96 7.04,54.41 8.79,56.15 9.55,56.15 18.6,65.2 21.3,65.2 | 21.3,65.2 38.4,65.2 75.9,27.7 76.5,27.7 Q2.1 | 21.3,65.2 20.7,65.8 20.7,66.4 U2.18
EPD_BUSY  (via drill 0.35)
  Top 0.152: v110.25,52.7 110.25,40.08 88.75,18.57 87.18,18.57 86.47,17.87 86.31,17.87 85.62,17.18 85.62,15.95 J1.9 | v122.25,61.7 133.5,61.7 EPD_BUSY.TP | v14.25,61.83 10.5,65.58 10.5,66.45 U2.26
  Bottom 0.152: v122.25,61.7 119.25,61.7 v110.25,52.7 102.12,60.83 88.38,60.83 86.25,58.7 17.38,58.7 v14.25,61.83
EPD_CS  (via drill 0.35)
  Top 0.152: v41.62,41.45 33.5,49.58 33.5,50.58 | 33.5,50.58 33.5,50.7 32.88,51.33 R9.2 | J1.12 84.12,15.95 84.12,17.07 84.25,17.2 84.25,17.57 84.81,18.12 84.81,18.35 87.37,20.91 v87.79,20.91 | 33.5,50.58 34.38,51.45 D6.2 | v20.62,45.95 20.62,48.95 U2.11 | v124.62,63.2 EPD_CS.TP | v94,42.95 v103.12,52.08
  Bottom 0.152: 91.25,41.45 v41.62,41.45 25.12,41.45 v20.62,45.95 | v124.62,63.2 113.5,52.08 v103.12,52.08 | v94,42.95 92.5,41.45 91.25,41.45 | v87.79,20.91 87.79,21.56 91.25,25.02 91.25,41.45
EPD_DC  (via drill 0.35)
  Top 0.152: v114.25,54.58 v114.25,45.83 | v120.75,61.08 122.88,63.2 EPD_DC.TP | v13,47.7 13,48.95 U2.5 | J1.11 84.62,15.93 84.62,17.51 85.11,18 85.11,18.22 87.19,20.3 88.04,20.3 88.44,20.7 v89.12,20.7
  Bottom 0.152: v114.25,45.83 103.12,34.7 | 103.12,34.7 v89.12,20.7 | v120.75,61.08 v114.25,54.58 | v13,47.7 14.12,46.58 91.25,46.58 103.12,34.7
EPD_RST  (via drill 0.35)
  Top 0.152: v111.75,55.95 v111.75,50.83 v111.75,41.58 | v117.5,61.7 117.5,62.7 EPD_RST.TP | J1.10 85.12,15.95 85.12,17.38 v86.22,18.48 | v74,52.7 57.75,68.95 18.88,68.95 16.75,66.83 16.75,66.58 U2.21
  Bottom 0.152: v111.75,41.58 88.75,18.57 86.32,18.57 v86.22,18.48 | v117.5,61.7 v111.75,55.95 | v74,52.7 75.88,50.83 v111.75,50.83
FLASH_CS  (via drill 0.35)
  Top 0.152: v74.88,24.95 75.38,24.95 76.38,23.95 D9.2 | R5.2 73.12,27.32 v72.12,27.32 72.12,29.82 42.25,59.7 34.5,59.7 34,59.2 U1.1 33.88,59.08 30.25,59.08 21.88,50.7 21.88,49.08 U2.12
  Bottom 0.152: v72.12,27.32 74.5,24.95 v74.88,24.95
GDR  (via drill 0.35)
  Top 0.152: v89.62,16.95 89.12,16.45 89.12,15.95 J1.2 | R4.2 73,16.82 v73.88,15.95 69.5,11.57 65.88,11.57 65.5,11.95 65.5,14.57 68.12,17.2 68.38,17.2 Q3.1
  Bottom 0.152: v73.88,15.95 81.41,15.95 81.41,15.94 88.62,15.94 v89.62,16.95
GND  (via drill 0.35)
  Top 0.152: v48.02,106.21 47.24,106.98 RESET_BUTTON.1 47.25,107.45 50.62,107.45 RESET_BUTTON.2 50.75,107.45 51.12,107.08 52.38,107.08 C5.2 | 13.5,97.95 13.5,93.7 16.38,90.83 J4.G2 16.38,90.7 10.62,84.95 | 13.5,97.95 13.5,98.7 D8.1 | 10.62,84.95 16.25,84.95 J4.G1 | 10.62,84.95 9.82,84.95 8.73,83.86 8.73,68.47 7.88,67.62 7.88,66.53 U2.28 7.88,66.45 7.88,66.2 v13.25,60.83 | CHANGE_BUTTON.1 62.25,107.45 v63.5,107.45 65.75,107.45 CHANGE_BUTTON.2 65.75,107.58 66.38,108.2 67.38,108.2 C10.2 67.83,107.89 81.06,107.89 87,101.95 GND.TP | 5.75,92.7 5.38,93.08 5.25,93.08 3.38,94.95 3.38,95.45 J4.G4 3.38,95.58 3.38,95.95 7,99.58 C9.2 7.12,99.7 v15.5,108.08 | 5.75,92.7 5.88,92.58 J4.P6 5.75,92.7 | 5.75,92.7 2.12,89.08 2.12,82.45 J4.G3 | C_DELAY.2 51.88,100.2 51.38,99.7 50.62,99.7 49.38,98.45 47.75,98.45 IC1.3 47.62,98.45 47,98.45 v46,99.45 44.5,97.95 13.5,97.95 | 25.88,107.58 26.5,108.2 27.5,108.2 C6.2 | 22.38,107.45 25.75,107.45 BOOT_BUTTON.2 25.88,107.58 | 25.88,107.58 v28.5,107.58 | 155.25,7.7 155.5,7.7 C2.2 155.25,7.7 | 155.25,7.7 154.38,7.7 C1.2 154.25,7.7 153.62,8.32 153.62,10.82 SENSOR2.7 153.5,10.95 153.5,11.32 152.75,12.07 152.75,13.82 SENSOR2.1 | 155.25,7.7 155.25,8.57 | 155.25,8.57 155.25,10.82 SENSOR2.5 | 155.25,8.57 164.38,17.7 J3.1 164.5,17.82 164.88,17.82 165.38,18.32 165.38,49.2 | 165.38,49.2 168,49.2 J2.MP1 168.12,49.2 168.12,59.33 J2.MP2 168,59.45 164.25,59.45 J2.MP4 164.12,59.33 149.88,59.33 147.5,56.95 146.5,56.95 140.5,62.95 | 165.38,49.2 164.25,49.2 J2.MP3 163.45,49.15 162.4,50.2 162.4,51.1 162.5,51.2 | 125.75,49.33 125,49.33 123.25,51.08 C1_BAT.2
  Top 0.152: 127.75,51.83 127.25,52.33 127.25,53.2 127.38,53.33 130.88,53.33 R2_BAT.1 131,53.45 132.75,55.2 | 127.75,51.83 128,51.83 MCP73831.2 127.75,51.83 | 132.75,55.2 140.5,62.95 | 140.5,62.95 140.75,63.2 TP5.TP 140.5,62.95 | 125.75,49.33 125.75,49.83 127.75,51.83 | 125.75,49.33 C2_BAT.2 | 12.38,57.45 13.5,57.45 U2.29_6 | 12.38,56.2 13.5,56.2 U2.29_5 | 14.88,55.45 14.88,55.08 U2.29_7 14.75,54.95 13.62,54.95 U2.29_4 13.5,54.95 12.38,54.95 U2.29_1 12.38,55.08 12.38,55.58 | 14.88,55.45 14.88,56.2 U2.29_8 14.88,56.33 14.88,57.45 U2.29_9 | 12.38,56.2 12.38,55.58 | 12.38,56.2 U2.29_2 12.38,56.33 12.38,57.45 | 12.38,57.45 U2.29_3 | U2.1 7.88,49.08 7.88,54.71 8.94,55.78 9.44,55.78 9.64,55.58 12.38,55.58 | U1.4 34,55.45 v35.12,55.45 36,55.45 37.75,57.2 U1.9 | 35.12,48.83 42.25,41.7 42.25,30.07 | 35.12,48.83 34.5,49.45 34.5,49.95 D6.1 | 42.25,30.07 42.25,28.45 41.38,27.57 D12.1 | v43.25,29.45 45,27.7 D11.1 | 42.25,30.07 v42,30.07 | v46.5,27.7 48.12,27.7 D10.1 | 35.12,48.83 v35.12,53.95 | 14.88,55.45 v22,55.45 | v133.12,42.7 132.12,41.7 R1_PWRUSB.1 | v130.5,42.7 128.88,42.7 128.75,42.83 C3.- | v118.5,44.33 118.5,43.45 C1_BAT2.2 | v121.62,42.7 122.5,42.7 IC4.2 | 136,54.7 136.12,54.83 U4.9 | 136,54.7 135.5,54.2 135.12,54.2 U4.4 135.12,54.08 v134.5,53.45 | 136,54.7 136.5,54.7 | 136.5,54.7 137,54.7 U4.6 137.12,54.58 140.88,54.58 142.38,53.08 143.62,53.08 | 136,54.7 U4.9 | 136.5,54.7 135.62,55.58 135.12,55.58 U4.1 | 136.5,54.7 U4.9 | C4_USB.2 149.88,49.58 150.12,49.58 151.12,48.58 C5_USB.2 151.25,48.58 153.12,50.45 153.12,53.58 152.88,53.83 R2-USB1.1 152.75,53.83 148.12,53.83 147.38,53.08 | 147.38,53.08 146.12,53.08 R2-USB.2 146,53.08 143.62,53.08
  Top 0.152: 147.38,53.08 148.25,52.2 148.62,52.2 D1.2 | 143.62,53.08 v143.62,51.83 | SJ1.1 66.88,13.07 66.88,13.32 68,14.45 70,14.45 R2.1 70.12,14.57 70.12,15.32 71.62,16.82 R4.1 71.62,19.32 EPD_C1.1 71.75,19.45 72.88,19.45 EPD_C2.1 73,19.32 74.88,17.45 | 74.88,17.45 75.62,16.7 | 75.62,16.7 77,15.32 77,13.45 J1.MP2 77.12,13.45 90.5,13.45 J1.MP1 | 75.62,16.7 v76.5,17.57 | v86.5,17.2 86.12,16.82 86.12,15.95 J1.8 | 74.88,17.45 74.88,23.82 D9.1 | 93.38,45.83 93.62,45.83 C10_SUPERCAP.2 | 93.38,45.83 90.88,45.83 | 90.88,45.83 90.38,45.83 C8.2 | U3.13 86.12,46.83 88.38,44.58 89.62,44.58 90.88,45.83 | 88.62,27.07 92.38,30.82 93.62,30.82 D3.1 | 88.62,27.07 87.25,25.7 81.88,25.7 C7.2 | 93.38,45.83 93.38,35.33 96.12,32.58 96.12,28.45 93,25.32 91.38,25.32 | 89.88,25.32 89.9,25.32 | 89.9,25.32 91.38,25.32 | v88.5,19.2 91.38,22.07 91.38,25.32 | v133.38,54.58 132.75,55.2 | 89.9,25.32 88.62,26.6 88.62,27.07 | C1_BAT1.1 120.8,39.83 v121.51,40.54 | J2.A1 J2.B12 | J1.17 81.59,16.83 v81.92,17.16
  Bottom 0.152: 46,108.11 46.12,108.11 v48.02,106.21 48.43,107.58 63.38,107.58 v63.5,107.45 | 46,108.11 28.5,108.11 | 28.5,108.11 27.68,108.11 27.62,108.08 v15.5,108.08 | 28.5,108.11 v28.5,107.58 | v46,99.45 46,108.11 | v42,30.07 42.62,30.07 v43.25,29.45 44.75,29.45 v46.5,27.7 49.62,24.57 69.5,24.57 v76.5,17.57 81.5,17.57 | v35.12,53.95 v35.12,55.45 v22,55.45 18.62,55.45 v13.25,60.83 | v121.62,42.7 v130.5,42.7 v133.12,42.7 137.5,47.08 139.75,47.08 143.62,50.95 v143.62,51.83 | v121.62,42.7 120.12,42.7 v118.5,44.33 116.38,42.2 111.5,42.2 v88.5,19.2 86.09,19.2 85.5,18.61 85.5,18.07 | v86.5,17.2 85.62,18.07 85.5,18.07 | v134.5,53.45 v133.38,54.58 | v121.62,42.7 121.5,42.58 121.5,40.56 v121.51,40.54 | v81.92,17.16 81.5,17.57 | 85.5,18.07 84.76,18.07 84.45,17.77 83.94,17.77 83.53,18.18 82.11,18.18 81.5,17.57
  pour Top (hatched): 93.16,10.14 93.18,10.12 93.18,0.18 170.02,0.18 170.02,67.02 92.08,67.02 92.06,67.04 92.04,67.06 92.02,67.08 92.02,111.02 66.88,111.02 66.88,109.58 66.86,109.56 66.84,109.54 66.82,109.52 21.38,109.52 21.36,109.54 21.34,109.56 21.32,109.58 21.32,111.02 0.18,111.02 0.18,0.18 74.62,0.18 74.62,10.02 74.64,10.04 74.76,10.16 74.78,10.18 93.12,10.18 93.14,10.16
  pour Bottom (hatched): 93.16,10.14 93.18,10.12 93.18,0.18 170.02,0.18 170.02,67.02 92.08,67.02 92.06,67.04 92.04,67.06 92.02,67.08 92.02,111.02 66.88,111.02 66.88,109.58 66.86,109.56 66.84,109.54 66.82,109.52 21.38,109.52 21.36,109.54 21.34,109.56 21.32,109.58 21.32,111.02 0.18,111.02 0.18,0.18 74.62,0.18 74.62,10.12 74.64,10.14 74.66,10.16 74.68,10.18 93.12,10.18 93.14,10.16
GPIO8
  Top 0.152: R1.1 19.38,46.45 19.38,48.95 U2.10
I2C_PW  (via drill 0.35)
  Top 0.152: SENSOR2.2 153.62,13.82 153.62,13.45 154.25,12.82 154.25,10.95 SENSOR2.6 154.25,10.82 v154.25,9.82 | C2.1 155.5,6.32 154.38,6.32 C1.1 154.25,6.32 153.12,7.45 R2-PINH.2 | 152.75,7.57 153,7.57 R2-PINH.2 | 152.75,7.57 151.88,7.57 R1_PINH.2 | 152.75,7.57 v152.75,9.82 152.75,10.82 SENSOR2.8 | 152.75,7.57 R2-PINH.2
  Bottom 0.152: v152.75,9.82 v154.25,9.82
INT_RTC  (via drill 0.35)
  Top 0.152: 87.88,57.45 87.5,57.08 U3.3 | 87.88,57.45 88,57.58 88,59.2 R1_PINH1.1 | v26.75,59.33 16.75,49.33 16.75,49.08 U2.8 | 87.88,57.45 v86,59.33 | INT_RTC.TP v148.62,63.2
  Bottom 0.152: v26.75,59.33 v86,59.33 90.5,63.83 124.88,63.83 125,63.7 148.12,63.7 v148.62,63.2
IO/BOOT  (via drill 0.35)
  Top 0.152: 21,106.95 21.25,106.95 21.5,106.7 27.25,106.7 27.5,106.95 C6.1 28.19,106.3 28.9,106.3 28.9,107.1 29.8,108 29.8,108.2 29.02,108.98 BOOT_BUTTON.3 | 21,106.95 20.62,106.95 R_BOOT.1 | v24.25,67.83 24.25,66.58 U2.15 | 21,106.95 v20.12,106.08 | 21,106.95 R_BOOT.1 | R_BOOT.1 21.3,107.68 21.3,108.53 21.83,108.53 BOOT_BUTTON.4 21.9,108.6
  Bottom 0.152: v20.12,106.08 18.75,104.7 4.25,104.7 4.25,94.08 8.15,90.17 8.15,83.92 v24.25,67.83
IO/CHANGE  (via drill 0.35)
  Top 0.152: 61,106.95 61.12,106.95 61.38,106.7 67.12,106.7 67.38,106.95 C10.1 67.51,107 v69,107 | 61,106.95 R_CHANGE.1 | R_CHANGE.1 | v45.88,98.45 14.25,66.83 14.25,66.58 U2.23 | 61,106.95 v61,106.08 | 62.25,108.7 CHANGE_BUTTON.4 62.25,108.79 61.7,108.24 61.34,108.24 61.17,108.08 61.17,107.62 R_CHANGE.1 | CHANGE_BUTTON.3 68.38,108.98 68.4,109 68.5,109 v69,108.5
  Bottom 0.152: v45.88,98.45 53.5,106.08 v61,106.08 | v69,108.5 v69,107
MISO  (via drill 0.35)
  Top 0.152: 41.25,26.2 40.5,26.95 40.5,28.2 41.25,28.95 D12.2 | 41.25,26.2 41.5,25.95 41.5,24.7 R8.2 | v30,57.95 33.88,57.95 U1.2 | v10,65.2 9.12,66.08 9.12,66.45 U2.27 9.11,83.28 v9.64,83.81 | v4.88,94.33 5.5,93.7 6.12,93.7 J4.P7 | v63.88,103.2 MISO.TP | 41.25,26.2 42.62,27.57 42.62,48.83 v37.5,53.95
  Bottom 0.152: v10,65.2 16.88,58.33 29.62,58.33 v30,57.95 33.5,57.95 v37.5,53.95 | 6.75,92.45 9,90.2 9,84.45 v9.64,83.81 | 6.75,92.45 v4.88,94.33 | v63.88,103.2 53.12,92.45 6.75,92.45
MOSI  (via drill 0.35)
  Top 0.152: U1.5 41.75,55.33 41.75,50.2 45,46.95 45,29.2 D11.2 45.12,29.07 45.88,28.32 45.88,24.2 | 45.88,24.2 45.5,24.2 45.25,24.45 R7.2 | J1.14 83.12,15.95 83.12,17.42 v83.28,17.57 | v15.5,45.95 15.5,48.95 U2.7 15.38,49.08 15.38,49.93 10.14,55.17 v9.19,55.17 | v8.12,68.72 5,71.85 5,88.2 6,89.2 J4.P3 6.12,89.33 6.38,89.33 8.25,91.2 v8.25,91.83 | v75.62,103.2 MOSI.TP | 45.88,24.2 v46.25,24.2
  Bottom 0.152: v15.5,45.95 37.25,24.2 v46.25,24.2 66.62,24.2 73.88,16.95 81.27,16.95 81.67,16.55 82.23,16.55 83.25,17.57 v83.28,17.57 | v75.62,103.2 64.25,91.83 v8.25,91.83 | v9.19,55.17 9.19,55.37 8.12,56.44 v8.12,68.72
N$1
  Top 0.152: IC1.5 50.5,100.33 50.75,100.33 51.38,100.95 52.38,100.95 52.62,100.7 52.62,99.58 52,98.95 C_DELAY.1
N$2  (via drill 0.35)
  Top 0.152: v123,39.7 122.12,39.7 C1_BAT1.2 | 123.38,41.33 122.88,41.33 122.62,41.58 IC4.3 122.5,41.7 120.5,41.7 D2.1 | 123.38,41.33 123.38,42.95 122.88,43.45 122.62,43.45 IC4.1 | 123.38,41.33 v123.62,41.33 | v134.12,42.7 133.62,43.2 133.62,48.2 Q1.2
  Bottom 0.152: v123,39.7 123,41.33 v123.62,41.33 132.75,41.33 v134.12,42.7
N$3  (via drill 0.35)
  Top 0.152: v124.38,50.83 124.38,51.2 123.38,52.2 123.38,52.45 R1_BAT.2 | v127.12,50.2 127.38,50.2 128,50.83 MCP73831.1
  Bottom 0.152: v124.38,50.83 125,50.2 v127.12,50.2
N$4  (via drill 0.35)
  Top 0.152: v145.12,52.45 145.75,51.83 146,51.83 R2-USB.1 | v162.38,55.83 162.75,55.83 162.88,55.95 163.54,55.95 J2.B5
  Bottom 0.152: v145.12,52.45 144.5,53.08 144.5,53.93 146.67,56.11 160.35,56.11 160.63,55.83 v162.38,55.83
N$5  (via drill 0.35)
  Top 0.152: v151.75,55.2 152.75,55.2 R2-USB1.2 | v162.38,53.08 163.54,53.08 J2.A5
  Bottom 0.152: v151.75,55.2 153.38,53.58 157.67,53.58 160.25,50.99 160.75,50.99 161.11,51.35 161.11,51.85 160.77,52.19 160.77,53.2 161.12,53.56 161.89,53.56 v162.38,53.08
N$6
  Top 0.152: 95.12,30.82 95,30.82 91.62,27.45 90.25,27.45 D4.1 | 95.12,30.82 95.25,30.82 C4.1 95.12,30.82 | 95.12,30.82 94.38,31.57 92.62,31.57 92,30.95 90.25,30.95 D3.2
N$7  (via drill 0.35)
  Top 0.152: v121.12,50.08 118.75,52.45 CHG_LED.C | v123.25,50.08 122.62,50.7 122.62,51.95 122.12,52.45 R1_BAT.1
  Bottom 0.152: v123.25,50.08 v121.12,50.08
N$8
  Top 0.152: R2_BAT.2 130.88,54.58 128.12,54.58 126.38,52.83 126.38,51.7 125.62,50.95 MCP73831.5
N$9
  Top 0.152: J1.24 78,15.95 78,20.32 77.88,20.45 77.88,22.7 78.62,23.45 EPD_C12.2
N$11  (via drill 0.35)
  Top 0.152: v79.25,21.32 79.12,21.2 79.12,15.95 J1.22 | v78.88,24.45 79.12,24.2 79.25,24.2 79.5,23.95 79.5,23.07 79.62,22.95 81.12,22.95 81.62,23.45 EPD_C10.2
  Bottom 0.152: v79.25,21.32 79.25,24.45 v78.88,24.45
N$13
  Top 0.152: J1.20 80.12,15.95 80.12,18.3 83.4,21.57 83.75,21.57 83.88,21.7 83.88,22.82 84.5,23.45 EPD_C8.2
N$14  (via drill 0.35)
  Top 0.152: v90.75,23.2 90.5,22.95 89.17,22.95 89.02,22.79 87.03,22.79 86.38,23.45 EPD_C7.2 | J1.19 80.62,15.95 80.62,17.82 83,20.2 v83,20.31
  Bottom 0.152: v90.75,23.2 88.4,20.85 88.4,20.66 88.04,20.3 87.54,20.3 87.53,20.31 v83,20.31
N$15  (via drill 0.35)
  Top 0.152: J1.18 81.09,17.19 v83,19.1 | v85.3,19.7 87.1,21.5 87.1,21.8 87.13,21.77 v87.13,21.53 | v88.91,24.36 88.85,24.36 EPD_C6.2
  Bottom 0.152: v83,19.1 83.6,19.7 v85.3,19.7 | v87.13,21.53 88.91,23.31 v88.91,24.36
N$17  (via drill 0.35)
  Top 0.152: v96.25,52.58 96.25,48.83 96.12,48.7 94.75,48.7 93.38,47.33 92.88,47.33 R_CAPACITOR.1 | v88.62,60.2 88.25,60.2 87.75,60.7 D7.1
  Bottom 0.152: v88.62,60.2 v96.25,52.58
N$26  (via drill 0.35)
  Top 0.152: v91.12,17.95 88.25,17.95 87.62,17.32 87.62,15.95 J1.5 | v69.88,20.07 71.12,21.32 72.38,21.32 EPD_C2.2
  Bottom 0.152: v91.12,17.95 91.12,17.45 91.25,17.32 91.25,14.95 70.75,14.95 69.25,16.45 69.25,20.07 v69.88,20.07
N$27  (via drill 0.35)
  Top 0.152: v90.62,17.07 90.12,17.57 88.38,17.57 88,17.2 88,15.95 J1.4 | v69.88,18.95 71.62,20.7 EPD_C1.2
  Bottom 0.152: v90.62,17.07 88.88,15.32 70.88,15.32 69.88,16.32 v69.88,18.95
N$32  (via drill 0.35)
  Top 0.152: 88,22.32 86.38,22.32 EPD_C7.1 86.25,21.61 v85.86,21.22 | 88,22.32 89.62,22.32 EPD_C5.1 | 88,22.32 EPD_C6.1 | 82.38,22.32 81.75,22.32 EPD_C10.1 81.62,22.32 80.38,22.32 EPD_C11.1 80.25,22.32 78.75,22.32 EPD_C12.1 | 82.38,22.32 83.12,22.32 EPD_C9.1 | v83.75,20.95 84.5,21.7 84.5,22.2 EPD_C8.1 | 82.38,22.32 82.38,21.41 v82.33,21.36
  Bottom 0.152: v82.33,21.36 82.38,21.32 83.38,21.32 v83.75,20.95 85.59,20.95 v85.86,21.22
PREVGH  (via drill 0.35)
  Top 0.152: v80.25,21.32 79.62,20.7 79.62,15.95 J1.21 | v80.5,24.45 81,24.45 81.25,24.2 82.5,24.2 83.12,23.57 EPD_C9.2 | v83.5,33.95 83.5,35.7 D5.1
  Bottom 0.152: v80.25,21.32 80.25,24.45 v80.5,24.45 83.5,24.45 v83.5,33.95
PREVGL  (via drill 0.35)
  Top 0.152: v78.5,20.7 78.5,15.95 J1.23 | v79.5,25.2 79.5,24.45 80.38,23.57 EPD_C11.2 | v90.62,25.95 92,27.32 93.75,27.32 D4.2
  Bottom 0.152: v79.5,25.2 78.25,25.2 78.25,24.2 78.5,23.95 v78.5,20.7 80.81,20.7 82.14,22.02 85.61,22.02 88.66,25.07 89.74,25.07 v90.62,25.95
RESE  (via drill 0.35)
  Top 0.152: v88.62,16.95 88.62,15.95 J1.3 | 70.12,16.95 69.75,17.32 Q3.2 | 70.12,16.95 v70.5,16.57 | 70.12,16.95 70.12,16.82 68.5,15.2 R3.2
  Bottom 0.152: v70.5,16.57 81.21,16.57 81.54,16.25 87.92,16.25 v88.62,16.95
RESE'
  Top 0.152: R3.1 65.88,13.82 65.88,12.07 66,11.95 67.5,11.95 68.25,12.7 68.25,12.95 SJ1.2 68.38,13.07 68.5,13.2 70,13.2 R2.2
RESET  (via drill 0.35)
  Top 0.152: IC1.1 47.62,100.33 47.62,105.45 46.25,106.83 46.25,107.58 45.62,108.2 R_RESET.1 | 45.8,108.26 C5.1 51.77,108.98 RESET_BUTTON.3 | v44,106.7 45.5,108.2 R_RESET.1 | RESET_BUTTON.4 47.16,108.9 46.3,108.9 45.8,108.4 45.8,108.26 | R_RESET.1 45.8,108.26 | v9.52,53.31 10.38,52.44 U2.3
  Bottom 0.152: v44,106.7 3.88,106.7 3.88,87.33 6.97,84.23 6.97,56.53 9.52,53.98 v9.52,53.31
RTC_RST  (via drill 0.35)
  Top 0.152: v23.12,67.83 23.12,66.58 U2.16 | v85.12,65.33 85.12,59.33 86.12,58.33 U3.4
  Bottom 0.152: v23.12,67.83 25,65.95 84.5,65.95 v85.12,65.33
RX  (via drill 0.35)
  Top 0.152: v13,65.2 13,66.45 U2.24 | v141,64.95 147,58.95 RX.TP
  Bottom 0.152: v13,65.2 13.5,64.7 140.75,64.7 v141,64.95
SCK  (via drill 0.35)
  Top 0.152: 49.38,26.07 v72,26.07 | 49.38,26.07 47.88,24.57 R12.2 | 43.88,54.2 48.12,49.95 48.12,29.2 D10.2 48.25,29.07 49.38,27.95 49.38,26.07 | 43.88,54.2 41.75,56.33 41.75,56.58 U1.6 | v14.12,50.33 14.12,49.08 U2.6 | 43.88,54.2 v42.38,52.7 | J4.P5 6,91.45 5.5,91.45 4.7,90.64 4.7,70.36 6.97,68.08 6.97,65.85 9.03,63.79 9.03,57.34 v9.04,57.33 | v84,95.08 SCK.TP | v55.5,52.7 v55.5,66.58 | J1.13 83.62,15.93 83.62,17.06 83.89,17.32 83.89,18.06 v84.2,18.38
  Bottom 0.152: v55.5,66.58 v84,95.08 | v55.5,52.7 v42.38,52.7 16.5,52.7 v14.12,50.33 14.12,52.22 v9.04,57.31 v9.04,57.33 | v72,26.07 78.37,19.71 81.53,19.71 82.75,18.49 84.08,18.49 v84.2,18.38
SCL  (via drill 0.35)
  Top 0.152: v153.12,5.32 153.12,6.2 R2-PINH.1 | v156.25,12.82 155.25,13.82 SENSOR2.4 | v141.25,55.08 137.12,55.08 U4.7 | v164.38,31.95 164.38,20.82 J3.4 | U2.20 18,66.83 19.62,68.45 36.5,68.45 v56.88,48.08 | v90.88,48.08 90.25,48.08 90,47.83 U3.16
  Bottom 0.152: v153.12,5.32 156.25,8.45 v156.25,12.82 164.38,20.95 v164.38,31.95 143.62,52.7 | 143.62,52.7 v141.25,55.08 | v56.88,48.08 v90.88,48.08 91,47.95 138.88,47.95 143.62,52.7
SDA  (via drill 0.35)
  Top 0.152: v145.12,53.7 143.12,55.7 v138,55.7 137.12,55.7 U4.8 | 154.25,16.45 154.25,13.95 SENSOR2.3 | 154.25,16.45 154.25,18.82 | 154.25,16.45 151.12,13.32 151.12,6.95 151.75,6.32 R1_PINH.1 | 154.25,18.82 164.38,18.82 J3.2 | v20.25,67.83 19.38,66.95 19.38,66.58 U2.19 | v79.38,65.33 79.38,56.2 86.75,48.83 | 86.75,48.83 86.75,46.7 88.5,44.95 89.5,44.95 89.75,45.2 89.75,46.33 88.75,47.33 88.75,47.7 U3.15 | 86.75,48.83 v89.38,51.45 | 154.25,18.82 154.25,44.54 v154.28,44.58
  Bottom 0.152: v145.12,53.7 154.25,44.58 v154.28,44.58 | v20.25,67.83 22.75,65.33 v79.38,65.33 | v138,55.7 133.75,51.45 v89.38,51.45
SRC  (via drill 0.35)
  Top 0.152: 81.75,32.83 82.38,32.2 95.25,32.2 C4.2 | v72.5,22.7 71.62,21.82 70.75,21.82 69.12,20.2 69.12,19.32 Q3.3 | 81.75,32.83 80.12,31.2 | 80.12,31.2 v79.38,30.45 | 81.75,32.83 L1.1 | 80.12,31.2 80.12,35.7 D5.2
  Bottom 0.152: v72.5,22.7 72.5,25.07 72.12,25.07 71.38,25.82 71.38,30.45 v79.38,30.45
SS_SD  (via drill 0.35)
  Top 0.152: v9.5,100.58 8.75,99.83 R10.2 | D8.2 14.88,98.7 v13.75,99.83 13.25,99.83 8.88,95.45 8.88,90.58 6.5,88.2 J4.P2 6.5,88.08 v7.5,87.08 | v11.62,52.83 11.62,49.08 U2.4
  Bottom 0.152: v9.5,100.58 10.25,99.83 v13.75,99.83 | v7.5,87.08 7.85,86.73 7.85,69.86 8.73,68.98 8.73,65.59 11.25,63.08 11.25,60.91 8.43,58.09 8.43,56.99 11.62,53.79 v11.62,52.83
TX  (via drill 0.35)
  Top 0.152: v11.75,65.2 11.75,66.45 U2.25 | v145.88,64.33 TX.TP
  Bottom 0.152: v11.75,65.2 12.62,64.33 v145.88,64.33
USB_D-  (via drill 0.35)
  Top 0.152: v142.88,51.08 148.62,51.08 D1.3 | v24.38,47.45 23.12,48.7 23.12,48.95 U2.13
  Bottom 0.152: v142.88,51.08 139.25,47.45 v24.38,47.45
VBAT
  Top 0.3: 135,54.7 134.7,54.7 134.4,54.4 | 134.4,54.4 132.9,52.9 132.9,52.6 | 132.9,52.6 132.9,50.5 Q1.3 132.6,50.5 130.2,48.1 126,48.1 C2_BAT.1 | 135,54.7 U4.3 | 132.9,52.6 128.4,52.6 MCP73831.3 | VBAT.TP 87,91 84.3,88.3 84.3,59.5 85.5,58.3 85.5,55.9 85.8,55.6 101.4,55.6 110.4,64.6 111.6,64.6 112.5,63.7 112.5,46.6 120.6,38.5 147.46,38.5 153.6,44.64 153.6,55.9 153,56.5 135,56.5 134.4,55.9 134.4,54.4 | 135,54.7 135,55.08 U4.2
VBUS
  Top 0.3: 150,50.8 150.9,49.9 C4_USB.1 | 150,50.8 150,51.4 150.9,52.3 D1.5 | PFMF.050.1.2 150.9,45.7 149.6,47 149.6,48.22 C5_USB.1 149.7,48.4 149.1,49 149.1,49.3 | 150,50.8 149.7,50.8 149.1,50.2 149.1,49.3 | 132,43 132,48.1 Q1.1 132,48.4 132.9,49.3 149.1,49.3 | 126.3,42.4 126.6,42.4 127.5,41.5 130.5,41.5 132,43 | 126.3,42.4 125.1,42.4 123.3,44.2 121.8,44.2 121.5,43.9 120.6,43.9 D2.2 | 132,43 R1_PWRUSB.2 | CHG_LED.A 120.3,52.3 120.9,52.3 121.8,51.4 C1_BAT.1 | 125.1,52.9 124.2,52.9 123.6,53.5 121.2,53.5 120.3,52.6 CHG_LED.A | 125.1,52.9 125.4,52.9 MCP73831.4 125.1,52.9 | VBUS.TP 87,84.1 90.9,80.2 90.9,66.7 91.8,65.8 112.2,65.8 125.1,52.9 | 126.3,42.4 126.3,46 120,52.3 CHG_LED.A
VRTC
  Top 0.152: C10_SUPERCAP.1 95.25,49.7 94.25,48.7 92.88,48.7 R_CAPACITOR.2 92.75,48.7 90.62,48.7 90.25,49.08 88.38,49.08 87.5,48.2 87.5,47.83 U3.14 87.5,47.7 87.5,47.2 88.25,46.45 88.38,46.45 89,45.83 C8.1
VUSB  (via drill 0.35)
  Top 0.152: J2.A4 J2.B9 163.49,51.9 163.1,51.9 | J2.B4 J2.A9
  Top 0.3: PFMF.050.1.1 146.63,45.17 v149.9,41.9 | 163.1,51.9 162.78,51.58 162.34,51.58 156.8,46.03 v156.8,38.4
  Top 0.305: J2.B4 161.11,56.51 v160.1,55.5 | v160.5,51.6 161.5,51.6 161.8,51.9 163.1,51.9
  Bottom 0.3: v149.9,41.9 155.3,36.5 155.9,36.5 156.8,37.4 v156.8,38.4
  Bottom 0.305: v160.1,55.5 160.1,52 v160.5,51.6

## Text on the board
tPlace: GND